# Altium PCB dsau-motherboard-revA.PcbDoc (part 4 of 4)
Units mil, origin at the board's own origin, x right, y up, seen from the top; angles counter-clockwise.
Board outline 9475 x 6400 mil, 4 copper layers (Component Side, Ground Plane, Power Plane, Solder Side), stack 65.2 mil thick; 212 components, 202 nets, 998 pads, 1047 vias.
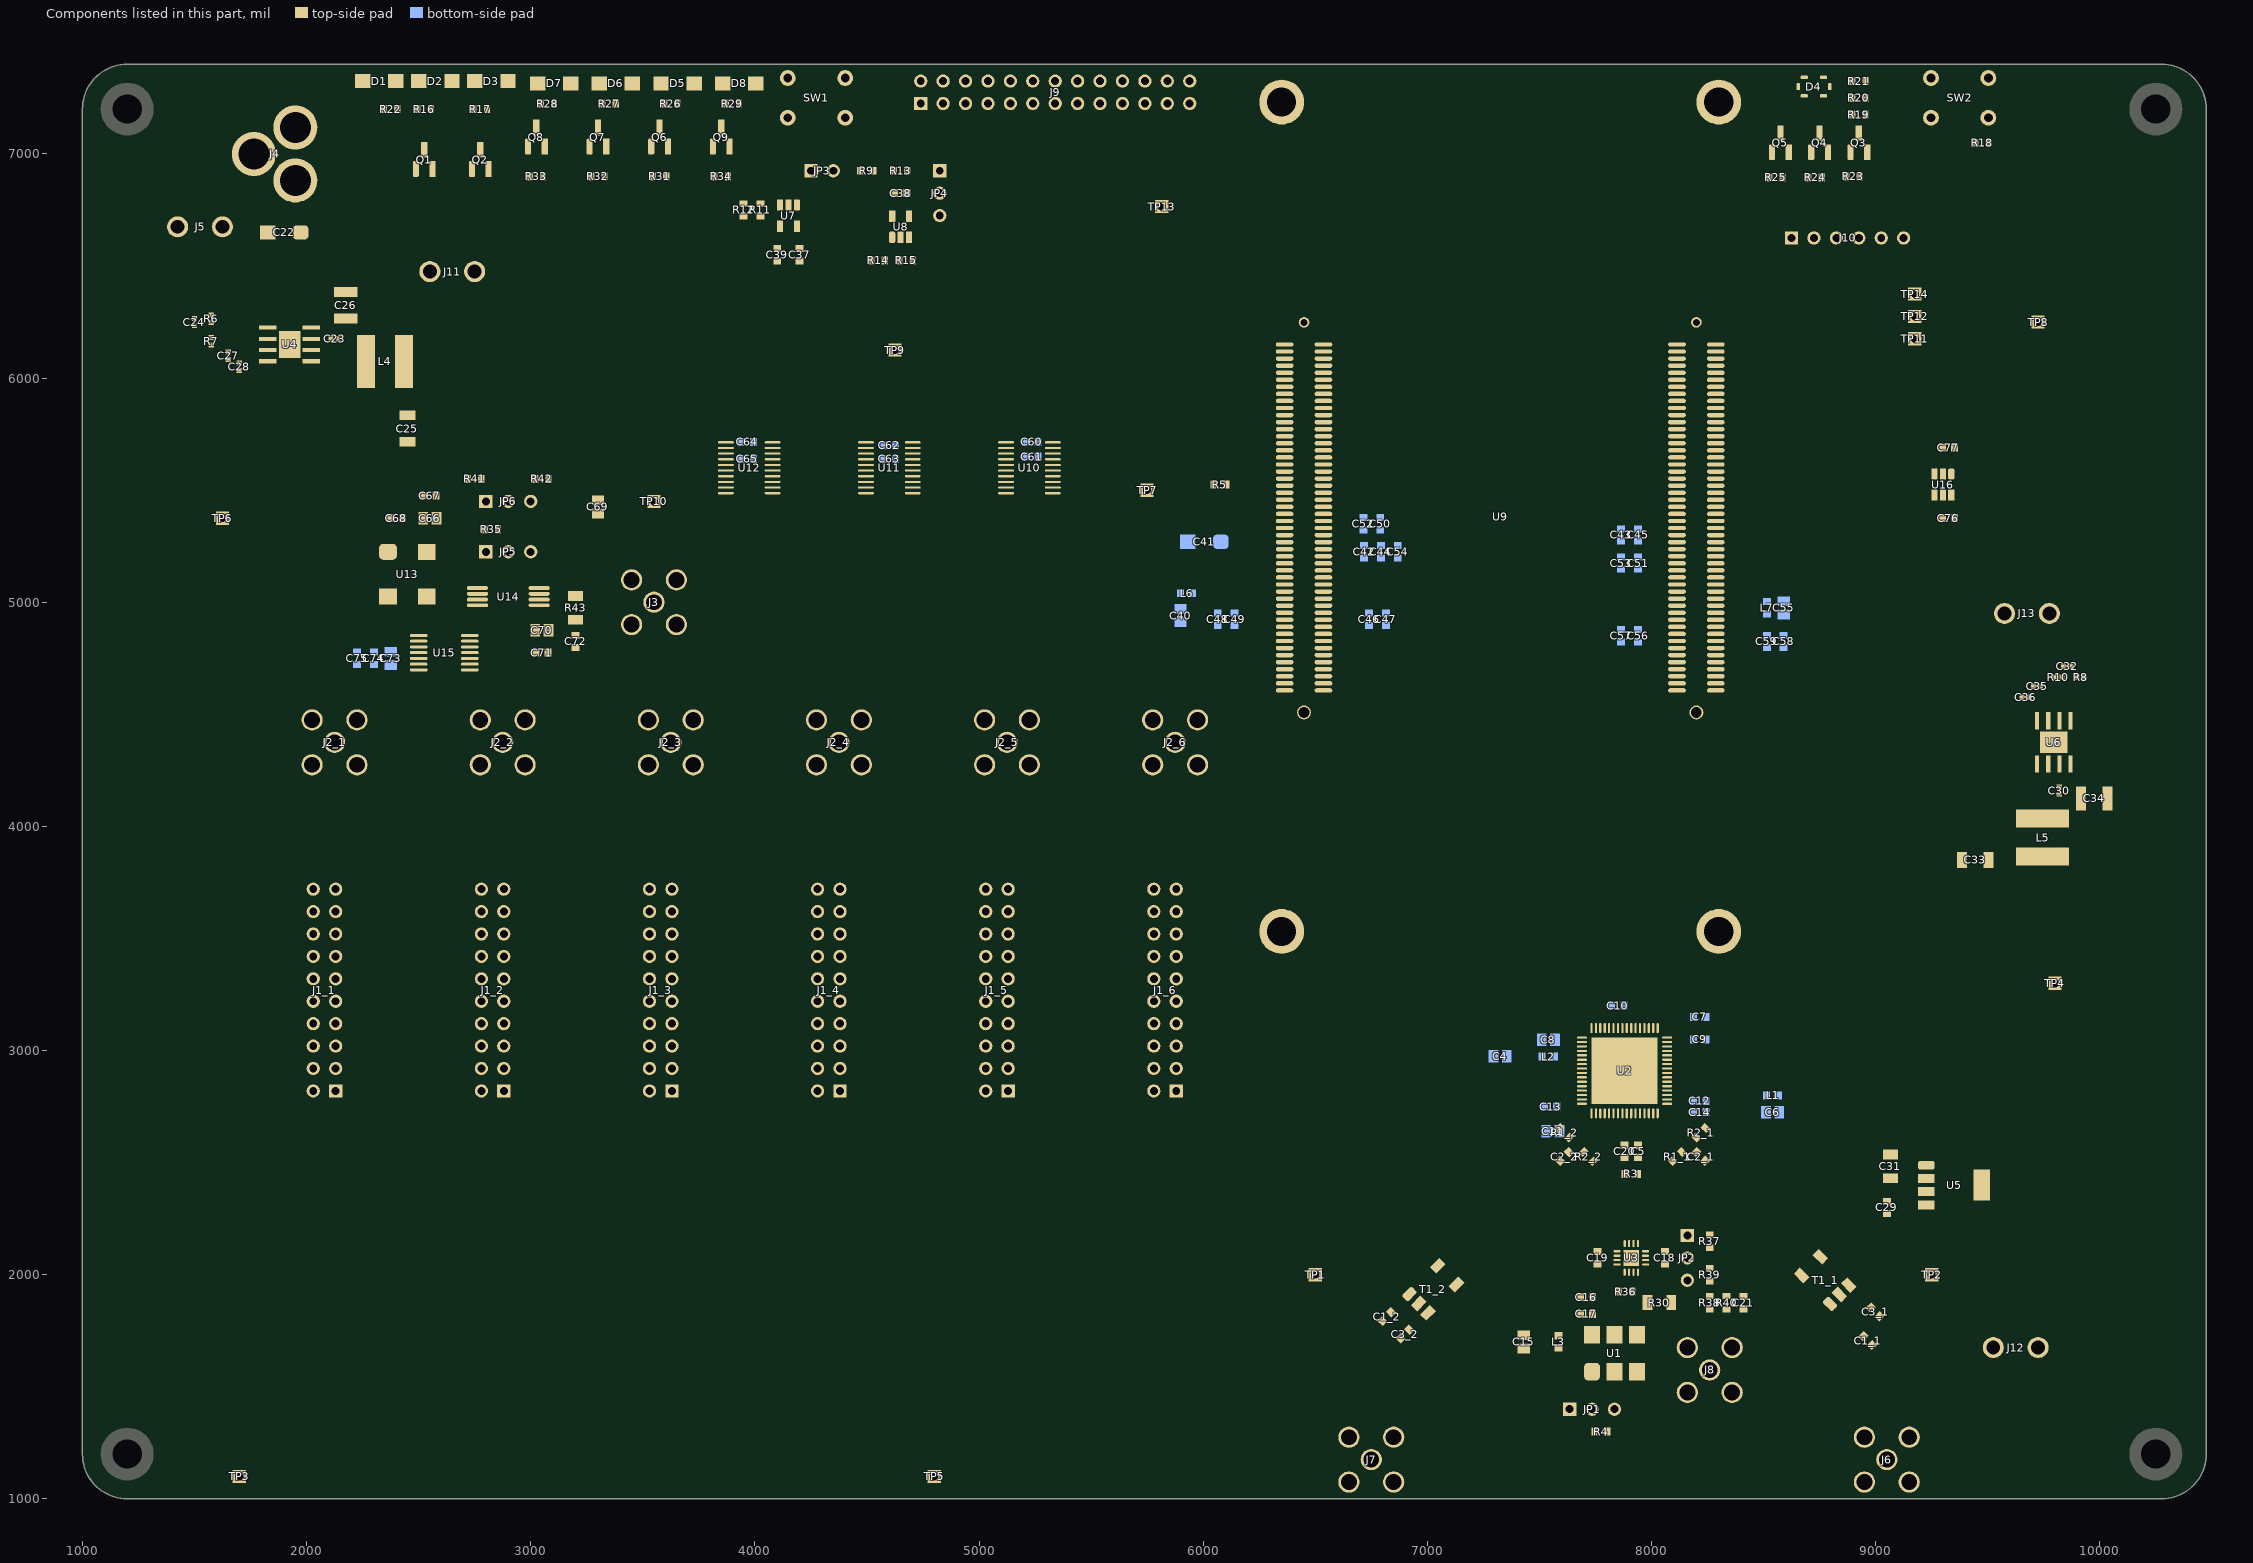
[diagram p6: the components of this part, seen from the top]

## Polygon pours and split planes (outlines as drawn) (continued)
A3V3 on Power Plane (split plane): 10454.9,1200 10454.97,1199.29 10454.61,1188.23 10453.46,1176.51 10451.54,1164.88 10448.86,1153.41 10445.44,1142.14 10441.3,1131.12 10436.43,1120.39 10430.88,1110 10424.66,1100 10417.8,1090.43 10410.33,1081.32 10402.28,1072.72 10393.68,1064.67 10384.57,1057.2 10375,1050.34 10365,1044.12 10354.61,1038.57 10343.88,1033.7 10332.86,1029.56 10321.59,1026.14 10310.12,1023.46 10298.49,1021.54 10286.77,1020.39 10275.71,1020.03 10275,1020.1 6262.56,1020.1 6262.56,2444.8 6605.2,2787.44 7162.44,2787.44 7162.44,2575 7162.68,2572.55 7163.4,2570.19 7164.56,2568.02 7166.12,2566.12 7168.02,2564.56 7170.19,2563.4 7172.55,2562.68 7175,2562.44 8425,2562.44 8427.45,2562.68 8429.81,2563.4 8431.98,2564.56 8433.88,2566.12 8558.88,2691.12 8560.44,2693.02 8561.6,2695.19 8562.32,2697.55 8562.56,2700 8562.56,2812.44 10454.9,2812.44
D1V8 on Power Plane (split plane): 10454.9,2837.56 8412.56,2837.56 8412.56,3350 8412.32,3352.45 8411.6,3354.81 8410.44,3356.98 8408.88,3358.88 8406.98,3360.44 8404.81,3361.6 8402.45,3362.32 8400,3362.56 7525,3362.56 7522.55,3362.32 7520.19,3361.6 7518.02,3360.44 7516.12,3358.88 7514.56,3356.98 7513.4,3354.81 7512.68,3352.45 7512.44,3350 7512.44,2812.56 7187.56,2812.56 7187.56,4537.44 9200,4537.44 9202.45,4537.68 9204.81,4538.4 9206.98,4539.56 9208.88,4541.12 9210.44,4543.02 9211.6,4545.19 9212.32,4547.55 9212.56,4550 9212.56,5512.44 10454.9,5512.44
NetC56_1 on Power Plane (split plane): 8462.44,4975 8462.68,4972.55 8463.4,4970.19 8464.56,4968.02 8466.12,4966.12 8468.02,4964.56 8470.19,4963.4 8472.55,4962.68 8475,4962.44 8612.44,4962.44 8612.44,4900 8612.68,4897.55 8613.4,4895.19 8614.56,4893.02 8616.12,4891.12 8618.02,4889.56 8620.19,4888.4 8622.55,4887.68 8625,4887.44 8787.44,4887.44 8787.44,4562.56 7187.56,4562.56 7187.56,5062.44 8462.44,5062.44
CLK_A3V3 on Power Plane (split plane): 8487.44,1787.56 8180.2,1787.56 8033.88,1933.88 8031.98,1935.44 8029.81,1936.6 8027.45,1937.32 8025,1937.56 7950,1937.56 7947.55,1937.32 7945.19,1936.6 7943.02,1935.44 7941.12,1933.88 7939.56,1931.98 7938.4,1929.81 7937.68,1927.45 7937.44,1925 7937.44,1800 7937.68,1797.55 7938.4,1795.19 7939.56,1793.02 7941.12,1791.12 7987.44,1744.8 7987.44,1212.56 7562.56,1212.56 7562.56,1419.8 7683.88,1541.12 7685.44,1543.02 7686.6,1545.19 7687.32,1547.55 7687.56,1550 7687.56,1700 7687.32,1702.45 7686.6,1704.81 7685.44,1706.98 7683.88,1708.88 7681.98,1710.44 7679.81,1711.6 7677.45,1712.32 7675,1712.56 7530.2,1712.56 7487.56,1755.2 7487.56,2175 7487.56,2287.44 8487.44,2287.44
NetC46_1 on Power Plane (split plane): 7162.44,4562.56 6012.56,4562.56 6012.56,4900 6012.32,4902.45 6011.6,4904.81 6010.44,4906.98 6008.88,4908.88 5987.56,4930.2 5987.56,4975 5987.32,4977.45 5986.6,4979.81 5985.44,4981.98 5983.88,4983.88 5937.56,5030.2 5937.56,5062.44 7162.44,5062.44
NetC7_1 on Power Plane (split plane): 8387.44,2837.56 8200,2837.56 8197.55,2837.32 8195.19,2836.6 8193.02,2835.44 8191.12,2833.88 8169.8,2812.56 7537.56,2812.56 7537.56,3337.44 8387.44,3337.44
NetC11_1 on Power Plane (split plane): 8537.44,2705.2 8419.8,2587.56 7187.56,2587.56 7187.56,2787.44 8175,2787.44 8177.45,2787.68 8179.81,2788.4 8181.98,2789.56 8183.88,2791.12 8205.2,2812.44 8537.44,2812.44

## Other copper
Component Side:
  region net GND: 1865,5925 1865,5980 1560,5980 1560,5925
  rectangle net GND: 9570,4440 9625,4725
  region net GND: 9575,4475.35 9550,4450.35 9575,4450.35
  region net GND: 9620,4475.35 9645,4450.35 9624.65,4450.35 9620,4455
  region net GND: 1825,5975 1850,6000 1850,5979.65 1845.35,5975
  region net GND: 1825,5930 1850,5905 1850,5930
  region net D3V3: 2400.35,5880 2400.35,6270 2550.35,6270 2550.35,5880
  region net NetC23_2: 2060.35,6105 2060.35,6150 2230.35,6150 2230.35,6105
  region net GND: 1880.35,6240 1850.35,6270 1850.35,6410 2000.35,6410 2000.35,6270 1965.35,6235 1965.35,6060 2000.35,6025 2000.35,5925 1845.35,5925 1845.35,6025 1880.35,6060
  region net GND: 1845.35,5925 1845.35,5650 2525.35,5650 2525.35,5745 2270.35,5745 2140.35,5875 2140.35,6025 2000.35,6025
  region net GND: 1850.35,6410 1850.35,6450 2250.35,6450 2250.35,6350 2000.35,6350
  region net GND: 2070.35,6025 2070.35,6090 1960.35,6090 1960.35,6025
  region net GND: 9670,4230 9735,4230 9735,4340 9670,4340
  region net GND: 10055,4450 10105,4450 10105,4050 9995,4050 9995,4300
  region net GND: 9570,4455 9325,4455 9325,3775 9450,3775 9450,4090 9520,4160 9670,4160 9670,4300
  region net NetC30_2: 9750,4240 9795,4240 9795,4070 9750,4070
  region net D1V8: 9550,3900 9940,3900 9940,3750 9550,3750
  region net GND: 9885,4420 9915,4450 10055,4450 10055,4300 9915,4300 9880,4335 9705,4335 9670,4300 9570,4300 9570,4455 9670,4455 9705,4420
  region net GND: 9300,2675 9300,2125 9950,2125 9950,2675
Ground Plane (plane layer: these items are gaps in the copper):
  lines w25: 6250,1000 6250,2450 ; 6675,2800 6600,2800 ; 7195,2800 6600,2800 ; 8300,2825 9275,2825 10475,2825 ; 6250,2450 6600,2800 ; 6250,2450 6600,2800
Power Plane (plane layer: these items are gaps in the copper):
  lines w25: 6250,1000 6250,2450 6600,2800 7175,2800 ; 7525,2800 7525,3350 8400,3350 8400,2825 ; 7575,2800 7175,2800 ; 8550,2825 8550,2700 8425,2575 7175,2575 7175,2800 ; 10475,2825 9600,2825 9350,2825 9300,2825 8200,2825 8175,2800 7675,2800 7175,2800 ; 10490,5525 9200,5525 9200,4550 8800,4550 ; 7175,2800 7175,5075 ; 7175,4550 8750,4550 8800,4550 ; 7175,4550 6000,4550 6000,4900 5975,4925 5975,4975 5925,5025 5925,5075 7175,5075 ; 7175,4550 7175,5075 ; 7175,5075 8475,5075 8475,4975 8625,4975 8625,4900 8800,4900 8800,4550 ; 7475,1750 7475,2175 7475,2300 8500,2300 8500,1775 8175,1775 8025,1925 7950,1925 7950,1800 8000,1750 8000,1200 7550,1200 7550,1425 7675,1550 7675,1700 7600,1700 7525,1700 7475,1750

## Silkscreen, mask and mechanical layers (free items; w line width, h text height)
Top Overlay:
  circle w25: c1475,7125 r15
  lines w8: 2190,1020 2250,1020 2250,3975 2190,3975 2190,1020 ; 2940,1020 2940,3975 3000,3975 3000,1020 2940,1020 ; 3690,1020 3750,1020 3750,3975 3690,3975 3690,1020 ; 4440,1020 4500,1020 4500,3975 4440,3975 4440,1020 ; 5190,1020 5250,1020 5250,3975 5190,3975 5190,1020 ; 5940,1020 6000,1020 6000,3975 5940,3975 5940,1020
  lines w25: 1404.29,7125 ccw(c1475,7125) 1545.71,7125 ; 1435,7290 1515,7290 ; 1475,6995 1475,7050 ; 1475,7125 1475,7210 ; 1475,7255 1475,7325 1475,7280
  text "5V" at 1590,7270 h80
  text "35W" at 1515,7165 h80
  text "BU EDF (edf.bu.edu)" at 9950,6925 h80 r270
  text "BU ECE Senior Design Team 19" at 10075,6925 h80 r270
  text "Christopher Woodall - Feb. 2014" at 10200,6925 h80 r270
  text "Roblyer dDOSI Undersampling [Rev. A]" at 10325,6925 h80 r270
  text "5V" at 1460,6400 h80
  text "D3.3V" at 2500,6225 h80
  text "D1.8V" at 9500,5150 h80
  text "1" at 2025,2425 h300
  text "2" at 2775,2425 h300
  text "3" at 3525,2425 h300
  text "4" at 4250,2425 h300
  text "5" at 5000,2425 h300
  text "6" at 5750,2425 h300
  text "A3.3V" at 9450,1850 h80
Mechanical 1:
  lines w25: 1000,7100 1000,1200 ccw(c1200,1200) 1200,1000 6800,1000 10275,1000 ccw(c10275,1200) 10475,1200 10475,2700 10475,5700 10475,7200 ccw(c10275,7200) 10275,7400 1200,7400 ; 5960,1000 5960,4500 ; 6000,4500 1500,4500 1500,1000 ; 1500,1000 6000,1000 1500,1000
Mechanical 2:
  lines w25: 1000,7100 1000,7200 ; 1000,7100 1000,1200 ccw(c1200,1200) 1200,1000 6800,1000 10275,1000 ccw(c10275,1200) 10475,1200 10475,2700 10475,5700 10475,7200 ccw(c10275,7200) 10275,7400 1200,7400 ; 1000,7100 1000,7200 ; 1000,7200 cw(c1200,7200) 1200,7400 ; 1000,7200 cw(c1200,7200) 1200,7400

## Dimensions
1200,1000 to 1450,4500 on Mechanical 1
1000,1000 to 1000,7400 on Mechanical 1
980,1000 to 10480,995 on Mechanical 1
2187.5,3975 to 2250,975 on Mechanical 15
2187.5,3975 to 2095,3725 on Mechanical 15

## Text inside footprints (layer, text, board x,y; h text height)
C23: Mechanical 1 "22" at 2125,6175 h50
C24: Mechanical 1 "22" at 1500,6266.5 h50 r270
C25: Mechanical 1 "30" at 2450,5775 h50 r270
C26: Mechanical 1 "59" at 2175,6325 h50 r90
C27: Mechanical 1 "22" at 1650,6100 h50 r270
C28: Mechanical 1 "22" at 1700,6050 h50 r270
C30: Mechanical 1 "22" at 9820,4160 h50 r270
C32: Mechanical 1 "22" at 9855,4714.65 h50
C33: Mechanical 1 "30" at 9445,3850.35 h50 r180
C34: Mechanical 1 "59" at 9975,4125 h50
C35: Mechanical 1 "22" at 9720,4625.35 h50 r180
C36: Mechanical 1 "22" at 9670,4575.35 h50 r180
J1_1: Top Overlay "20" at 2050,3780 h50 r90; Top Overlay "19" at 2150,3780 h50 r90; Top Overlay "1" at 2150,2720 h50 r90; Top Overlay "2" at 2050,2720 h50 r90
J1_2: Top Overlay "20" at 2800,3780 h50 r90; Top Overlay "19" at 2900,3780 h50 r90; Top Overlay "1" at 2900,2720 h50 r90; Top Overlay "2" at 2800,2720 h50 r90
J1_3: Top Overlay "20" at 3550,3780 h50 r90; Top Overlay "19" at 3650,3780 h50 r90; Top Overlay "1" at 3650,2720 h50 r90; Top Overlay "2" at 3550,2720 h50 r90
J1_4: Top Overlay "20" at 4300,3780 h50 r90; Top Overlay "19" at 4400,3780 h50 r90; Top Overlay "1" at 4400,2720 h50 r90; Top Overlay "2" at 4300,2720 h50 r90
J1_5: Top Overlay "20" at 5050,3780 h50 r90; Top Overlay "19" at 5150,3780 h50 r90; Top Overlay "1" at 5150,2720 h50 r90; Top Overlay "2" at 5050,2720 h50 r90
J1_6: Top Overlay "20" at 5800,3780 h50 r90; Top Overlay "19" at 5900,3780 h50 r90; Top Overlay "1" at 5900,2720 h50 r90; Top Overlay "2" at 5800,2720 h50 r90
J9: Top Overlay "2" at 4640,7305 h50; Top Overlay "1" at 4640,7205 h50; Top Overlay "25" at 6000,7205 h50; Top Overlay "26" at 6000,7305 h50
L4: Mechanical 1 "177.1654" at 2350,6075 h50 r180
L5: Mechanical 1 "177.1654" at 9745,3950.35 h50 r90
R6: Mechanical 1 "22" at 1570,6260 h50 r270
R7: Mechanical 1 "22" at 1575,6165 h50 r270
R8: Mechanical 1 "22" at 9915,4665.35 h50 r180
R10: Mechanical 1 "22" at 9815,4665.35 h50 r180
U4: Mechanical 1 "100" at 1925,6150 h50; Top Overlay "*" at 1818,6288.14 h50; Mechanical 13 "*" at 1818,6288.14 h50
U6: Mechanical 1 "100" at 9795,4375.35 h50 r270; Top Overlay "*" at 9933.14,4482.35 h50 r270; Mechanical 13 "*" at 9933.14,4482.35 h50 r270
U9: Top Overlay "JX2" at 6390.94,6346.85 h60; Top Overlay "JX1" at 8142.91,6346.85 h60; Top Overlay "1 (101)" at 6646.85,6209.06 h60 r90; Top Overlay "2 (102)" at 6312.2,6189.37 h60 r90; Top Overlay "100 (200)" at 6290,4350 h60 r90; Top Overlay "99 (199)" at 6685,4350 h60 r90; Top Overlay "99" at 8397.35,4457.09 h60 r90; Top Overlay "100" at 8062.7,4437.4 h60 r90; Top Overlay "2" at 8062.7,6189.37 h60 r90; Top Overlay "1" at 8397.35,6209.06 h60 r90